# EAGLE board drv_8302_ME5120 (EAGLE 9.7.0)
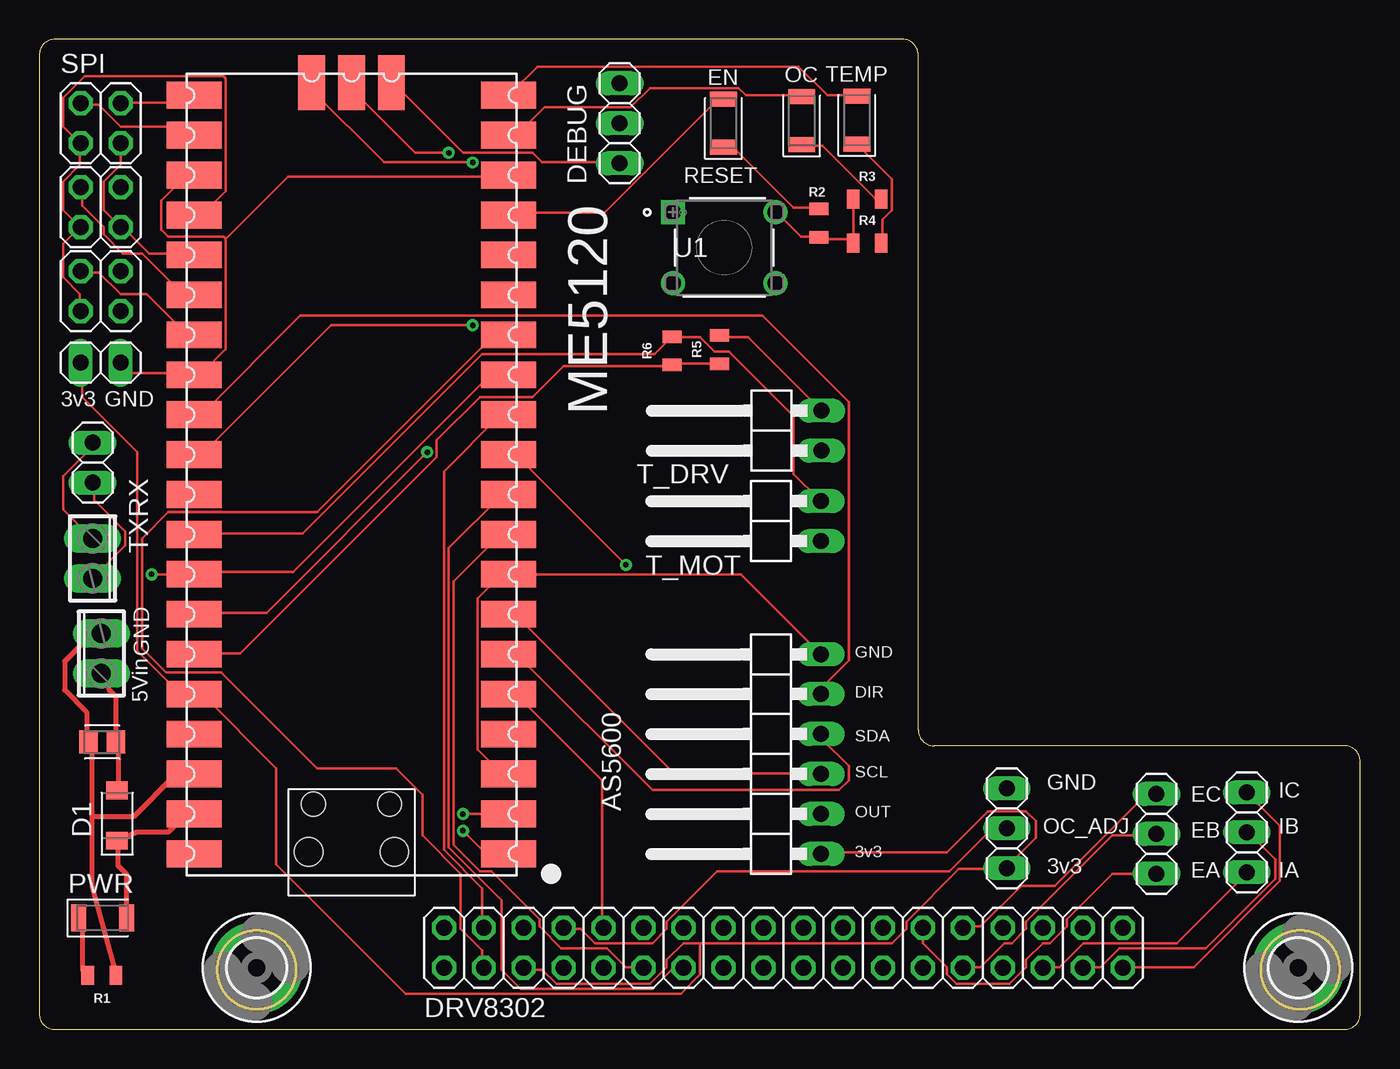
[diagram p0: board, top side]
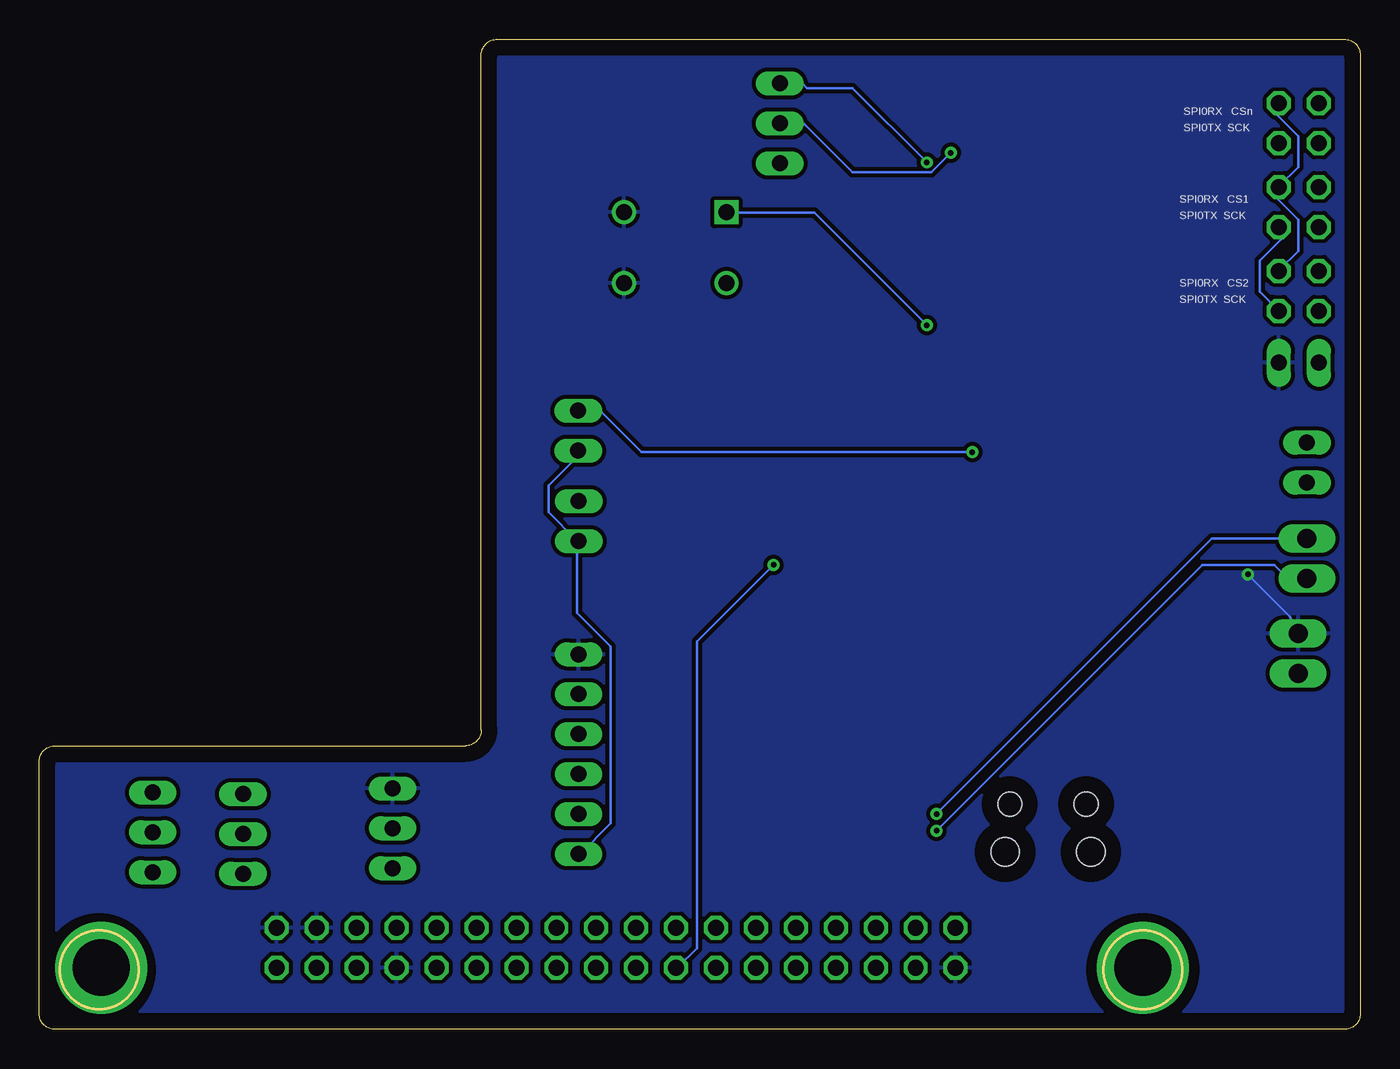
[diagram p1: board, bottom side, seen from below]

Size 84.03 x 63 mm. Coordinates in mm from the lower left corner, seen from the top.
Outline: 55.92,19.05 55.92,62 arc90 54.92,63 1,63 arc90 0,62 0,1 arc90 1,0 83.03,0 arc90 84.03,1 84.03,17.05 arc90 83.03,18.05 56.92,18.05 arc-90 55.92,19.05
Outline: circle at 80.23,3.8 radius 2.5
Outline: circle at 13.83,3.8 radius 2.5
Copper layers (1*16): Top 0.035mm / dielectric 1.5mm / Bottom 0.035mm
Design rules "Fusion Electronics Design Rules": minimum track width 6mil, minimum drill 0.35mm, track to track 6mil, track to pad 6mil, pad to pad 6mil, via to via 6mil, smd to smd 6mil, copper to edge 40mil, drill to drill 6mil, minimum pad ring 10mil, minimum via ring 8mil, stop-mask expansion 4mil, vias tented up to drill 0mil, thermal gap 10mil

## Footprints (pad centres in the part's own frame; a part is rotated, then mirrored left to right if it is on the bottom)
1X06/90 = drill 1.016 long: 1 -6.35,-3.81; 2 -3.81,-3.81; 3 -1.27,-3.81; 4 1.27,-3.81; 5 3.81,-3.81; 6 6.35,-3.81
CAPC2012X110 = smd 1.165 x 1.465: 1 -0.875,0; 2 0.875,0
SODFL3718X115 = smd 1.115 x 1.361: 1 -1.6,0; 2 1.6,0
1X03 = drill 1.016 long: 1 -2.54,0; 2 0,0; 3 2.54,0
2X18 = drill 1.016 octagon: 1 -21.59,-1.27; 2 -21.59,1.27; 3 -19.05,-1.27; 4 -19.05,1.27; 5 -16.51,-1.27; 6 -16.51,1.27; 7 -13.97,-1.27; 8 -13.97,1.27; 9 -11.43,-1.27; 10 -11.43,1.27; 11 -8.89,-1.27; 12 -8.89,1.27; 13 -6.35,-1.27; 14 -6.35,1.27; 15 -3.81,-1.27; 16 -3.81,1.27; 17 -1.27,-1.27; 18 -1.27,1.27; 19 1.27,-1.27; 20 1.27,1.27; 21 3.81,-1.27; 22 3.81,1.27; 23 6.35,-1.27; 24 6.35,1.27; 25 8.89,-1.27; 26 8.89,1.27; 27 11.43,-1.27; 28 11.43,1.27; 29 13.97,-1.27; 30 13.97,1.27; 31 16.51,-1.27; 32 16.51,1.27; 33 19.05,-1.27; 34 19.05,1.27; 35 21.59,-1.27; 36 21.59,1.27
LEDC3216X75N_FLAT-G = smd 0.962 x 1.712: A 1.525,0; C -1.525,0
1X02 = drill 1.016 long: 1 -1.27,0; 2 1.27,0
3,6-PAD = drill 3.6 pad 5.842: B3,6 0,0
LEDC3216X75N_FLAT-R = smd 0.962 x 1.712: A 1.525,0; C -1.525,0
2POL254 = drill 1.2 long: 1 -1.27,0; 2 1.27,0
0805 = smd 0.8 x 1.2: 1 -0.9,0; 2 0.9,0
PICO-PKG-SMD = smd 3.5 x 1.7: P$1 -10,24.13; P$2 -10,21.59; P$3 -10,19.05; P$4 -10,16.51; P$5 -10,13.97; P$6 -10,11.43; P$7 -10,8.89; P$8 -10,6.35; P$9 -10,3.81; P$10 -10,1.27; P$11 -10,-1.27; P$12 -10,-3.81; P$13 -10,-6.35; P$14 -10,-8.89; P$15 -10,-11.43; P$16 -10,-13.97; P$17 -10,-16.51; P$18 -10,-19.05; P$19 -10,-21.59; P$20 -10,-24.13; P$21 10,-24.13; P$22 10,-21.59; P$23 10,-19.05; P$24 10,-16.51; P$25 10,-13.97; P$26 10,-11.43; P$27 10,-8.89; P$28 10,-6.35; P$29 10,-3.81; P$30 10,-1.27; P$31 10,1.27; P$32 10,3.81; P$33 10,6.35; P$34 10,8.89; P$35 10,11.43; P$36 10,13.97; P$37 10,16.51; P$38 10,19.05; P$39 10,21.59; P$40 10,24.13 | smd 1.7 x 3.5: P$41 -2.54,-24.925; P$42 0,-24.925; P$43 2.54,-24.925 | hole 1.8: -2.725,24; 2.725,24 | hole 1.5: -2.425,20.97; 2.425,20.97
2X02 = drill 1.016 octagon: 1 -1.27,-1.27; 2 -1.27,1.27; 3 1.27,-1.27; 4 1.27,1.27
1X02/90 = drill 1.016 long: 1 -1.27,-3.81; 2 1.27,-3.81
SWITCH_1-1825910-0 = drill 1.016 pad 1.524 square: 1 -6.502,4.496 | drill 1.016 pad 1.524: 2 -6.502,0; 3 0,0; 4 0,4.496

## Placement (x,y rotation side)
AS5600  [1X06/90]  45.92,17.53 90 top
C1  10uf  [CAPC2012X110]  4,18.29 0 top
D1  MBR0520LT1G  [SODFL3718X115]  4.95,13.61 90 top
DEBUG  PINHD-1X3  [1X03]  36.92,57.66 90 top
DRV8302  [2X18]  47.33,5.21 0 top
EN  LED_GREEN  [LEDC3216X75N_FLAT-G]  43.52,57.66 90 top
FTDI_PSU  PINHD-1X2  [1X02]  3.9,42.42 0 top
H1  MOUNT-PAD-ROUND3.6  [3,6-PAD]  13.83,3.94 0 top
H2  MOUNT-PAD-ROUND3.6  [3,6-PAD]  80.09,3.94 0 top
JP_EMF  PINHD-1X3  [1X03]  71.08,12.45 90 top
JP_IOUT  PINHD-1X3  [1X03]  76.82,12.55 90 top
JP_OC  PINHD-1X3  [1X03]  61.55,12.8 90 top
OC  LED_RED  [LEDC3216X75N_FLAT-R]  48.5,57.83 90 top
PSU_BLOCK  [2POL254]  3.95,23.93 90 top
PWR  LED_GREEN  [LEDC3216X75N_FLAT-G]  4.04,7.11 0 top
R1  [0805]  3.98,3.44 180 top
R2  [0805]  49.6,51.31 90 top
R3  [0805]  52.66,52.83 0 top
R4  [0805]  52.66,50.04 0 top
R5  [0805]  43.27,43.26 90 top
R6  [0805]  40.26,43.18 270 top
RPI_PICO  RASPBERRY_PICOSMD  [PICO-PKG-SMD]  19.86,35.31 180 top
SERIAL  PINHD-1X2  [1X02]  3.39,36.07 270 top
SPI  PINHD-2X2  [2X02]  3.9,57.66 0 top
SPI_EXTRA  PINHD-2X2  [2X02]  3.9,46.99 0 top
SPI_INF  PINHD-2X2  [2X02]  3.9,52.32 0 top
T_DRV  PINHD-1X2/90  [1X02/90]  45.93,38.1 90 top
T_MOT  PINHD-1X2/90  [1X02/90]  45.9,32.34 90 top
TEMP  LED_RED  [LEDC3216X75N_FLAT-R]  52.01,57.86 90 top
TXRX  [2POL254]  3.39,29.97 270 top
U1  1-1825910-0  [SWITCH_1-1825910-0]  46.82,47.5 0 top

## Library data of the parts
AS5600 DRV8302 = pinhead
C1 = Capacitor; CATEGORY: Capacitor
D1 = Diode; CATEGORY: Diode; DESCRIPTION: DIODE SCHOTTKY 20V 500MA SOD123; MANUFACTURER: ON Semiconductor; MPN: MBR0520LT1G; SUB-CATEGORY: Schottky
DEBUG JP_EMF JP_IOUT JP_OC SPI SPI_EXTRA SPI_INF = Connector; CATEGORY: CONNECTOR; SUB-CATEGORY: PIN-HEADER
EN PWR = LED; CATEGORY: LED; COLOR: GREEN; DESCRIPTION: CHIP LED FLAT; SUB-CATEGORY: CHIP; TYPE: FLAT_TOP
FTDI_PSU SERIAL = Connector; CATEGORY: Headers; DESCRIPTION: Header, Straight, 2 Position; MANUFACTURER: Generic; MPN: Generic; OPERATING_TEMPERATURE: Generic; PART_STATUS: Active; PITCH: 0.100" (2.54mm); ROHS_COMPLIANCE: Generic; SERIES: Generic; SUB-CATEGORY: Headers, Male Pins; TYPE: Board to Board or Cable, Unshrouded, Through Hole, Straight
H1 H2 = holes
OC TEMP = LED; CATEGORY: LED; COLOR: RED; DESCRIPTION: CHIP LED FLAT; SUB-CATEGORY: CHIP; TYPE: FLAT_TOP
PSU_BLOCK TXRX = con-phoenix-254; OC_FARNELL: unknown; OC_NEWARK: unknown
R1-R6 = SparkFun-Resistors
RPI_PICO = RpiPico
T_DRV T_MOT = Connector; CATEGORY: Headers; DESCRIPTION: Header, Right Angle, 2 Position; MANUFACTURER: Generic; MPN: Generic; OPERATING_TEMPERATURE: Generic; PART_STATUS: Active; PITCH: 0.100" (2.54mm); ROHS_COMPLIANCE: Generic; SERIES: Generic; SUB-CATEGORY: Headers, Male Pins; TYPE: Board to Board or Cable, Unshrouded, Through Hole, Right Angle
U1 = Switches; BUILT_BY: EMA_UL_Team; CATEGORY: Tactile Switches; COPYRIGHT: Copyright (C) 2016 Accelerated Designs. All rights reserved; DESCRIPTION: FSM6JH=6MM TACT SWITCH, HIGH TEMP; MANUFACTURER_PART_NUMBER: 1-1825910-0; PART_STATUS: active; SERIES: Unknown; VENDOR: TE Connectivity

## Nets
5V: D1.1 PWR.A RPI_PICO.P$39
ADC_GND: R5.1 R6.2 RPI_PICO.P$35
ALARM_OC: OC.A RPI_PICO.P$19
ALARM_TEMP: RPI_PICO.P$20 TEMP.A
DIR: AS5600.5 RPI_PICO.P$29
EMF-A: DRV8302.26 JP_EMF.1
EMF-B: DRV8302.27 JP_EMF.2
EMF-C: DRV8302.28 JP_EMF.3
EN-GATE: DRV8302.10 RPI_PICO.P$5
EN_LED: EN.A RPI_PICO.P$17
GAIN: DRV8302.7
GND: AS5600.6 C1.1 DRV8302.1 DRV8302.29 DRV8302.34 DRV8302.36 FTDI_PSU.2 JP_OC.3 PSU_BLOCK.2 R1.1 R2.1 R3.1 R4.1 RPI_PICO.P$3 RPI_PICO.P$8 RPI_PICO.P$13 RPI_PICO.P$18 RPI_PICO.P$23 RPI_PICO.P$28 RPI_PICO.P$33 RPI_PICO.P$38 U1.3 U1.4
INHA: DRV8302.11 RPI_PICO.P$9
INHB: DRV8302.13 RPI_PICO.P$10
INHC: DRV8302.15 RPI_PICO.P$11
IOUTA: DRV8302.31 JP_IOUT.1
IOUTB: DRV8302.33 JP_IOUT.2
IOUTC: DRV8302.35 JP_IOUT.3
M_OC: DRV8302.6
N$1: PWR.C R1.2
N$2: OC.C R3.2
N$3: EN.C R2.2
N$4: R4.2 TEMP.C
N_FAULT: DRV8302.4 RPI_PICO.P$12
N_OCTW: DRV8302.3 RPI_PICO.P$14
OC_ADJ: DRV8302.8 JP_OC.2
OC_CAL: DRV8302.9
OUT_PWM: AS5600.2
PWR: C1.2 D1.2 PSU_BLOCK.1
PWRGD: DRV8302.2
RESET: RPI_PICO.P$30 U1.1
RX: RPI_PICO.P$2 SERIAL.1 TXRX.1
SCL: AS5600.3 RPI_PICO.P$7
SDA: AS5600.4 RPI_PICO.P$6
SPI0CS1: RPI_PICO.P$26 SPI_INF.2
SPI0CS2: RPI_PICO.P$27 SPI_EXTRA.2
SPI0CSN: RPI_PICO.P$22 SPI.2
SPI0RX: RPI_PICO.P$21 SPI.4 SPI_EXTRA.4 SPI_INF.4
SPI0SCK: RPI_PICO.P$24 SPI.1 SPI_EXTRA.1 SPI_INF.1
SPI0TX: RPI_PICO.P$25 SPI.3 SPI_EXTRA.3 SPI_INF.3
SWCLK: DEBUG.1 RPI_PICO.P$41
SWDIO: DEBUG.3 RPI_PICO.P$43
SWGND: DEBUG.2 RPI_PICO.P$42
T_DRV: R5.2 RPI_PICO.P$34 T_DRV.2
T_MOT: R6.1 RPI_PICO.P$32 T_MOT.2
TX: RPI_PICO.P$1 SERIAL.2 TXRX.2
V_REF: DRV8302.32
VBUS: RPI_PICO.P$40
VCC_3V3: AS5600.1 DRV8302.5 FTDI_PSU.1 JP_OC.1 RPI_PICO.P$36 T_DRV.1 T_MOT.1

## Tracks (layer width: path | path; a pad name or v marks a point on that pad's centre or on a via)
5V
  Top 0.152: RPI_PICO.P$39 9.74,13.72
  Top 0.305: PWR.A 5.56,9.86 5.01,10.41 5.01,11.89 D1.1 6.18,12.55 8.2,12.55 9.37,13.72 9.74,13.72
ADC_GND
  Top 0.152: R5.1 40.37,42.37 R6.2 40.22,42.22 33.36,42.22 31.38,40.23 28.03,40.23 25.28,37.49 25.28,36.42 12.79,23.93 9.89,23.93 RPI_PICO.P$35
ALARM_OC
  Top 0.152: OC.A 48.45,59.44 44.94,59.44 44.48,59.89 38.85,59.89 37.63,58.67 32.14,58.67 30.46,57 30.01,57 RPI_PICO.P$19
ALARM_TEMP
  Top 0.152: TEMP.A 51.95,59.44 50.12,59.44 48.29,61.27 31.68,61.27 30.01,59.59 RPI_PICO.P$20
DIR
  Top 0.152: AS5600.5 49.82,21.34 49.82,21.79 51.5,23.47 51.5,39.93 46.01,45.41 16.6,45.41 10.35,39.17 9.89,39.17 RPI_PICO.P$29
EMF-A
  Top 0.152: DRV8302.26 56.22,6.4 56.22,5.49 57.74,3.96 57.74,3.5 58.35,2.9 61.71,2.9 62.77,3.96 62.77,4.42 63.84,5.49 64.3,5.49 65.36,6.55 65.36,7.01 68.26,9.91 71,9.91 JP_EMF.1
EMF-B
  Top 0.152: DRV8302.27 58.81,3.96 59.88,3.96 61.4,5.49 61.86,5.49 62.77,6.4 62.77,6.86 68.26,12.34 71,12.34 JP_EMF.2
EMF-C
  Top 0.152: DRV8302.28 58.81,6.55 59.88,6.55 62.47,9.14 64.6,9.14 70.39,14.94 71,14.94 JP_EMF.3
EN-GATE
  Top 0.152: DRV8302.10 35.8,6.55 35.8,15.85 30.31,21.34 30.01,21.34 RPI_PICO.P$5
EN_LED
  Top 0.152: EN.A 43.42,59.13 43.11,59.13 35.95,51.97 30.01,51.97 RPI_PICO.P$17
GND  (via drill 0.35)
  Top 0.152: RPI_PICO.P$13 29.85,41.6 28.64,41.6 16.14,29.11 9.89,29.11 RPI_PICO.P$33 9.74,28.96 v7.15,28.96 | RPI_PICO.P$3 29.85,16.31 29.4,16.31 27.87,17.83 27.87,27.43 29.4,28.96 RPI_PICO.P$8 30.01,28.96 44.64,28.96 49.67,23.93 AS5600.6 | R3.1 51.8,52.73 51.8,50.14 R4.1 51.65,50.14 51.5,50.29 49.67,50.29 R2.1 49.51,50.44 48.45,50.44 46.92,51.97 U1.4 | FTDI_PSU.2 5.17,42.37 5.78,41.76 9.74,41.76 RPI_PICO.P$28 9.89,41.76 10.35,41.76 11.87,43.28 11.87,50.29 | 11.87,50.29 11.72,50.44 8.21,50.44 7.76,50.9 7.76,52.73 9.28,54.25 9.74,54.25 RPI_PICO.P$23 | 11.87,50.29 15.83,54.25 29.85,54.25 RPI_PICO.P$18
  Top 0.203: 3.18,18.29 C1.1 3.03,18.29
  Top 0.305: 3.34,13.56 3.34,14.33 3.34,18.14 3.18,18.29 | 3.34,13.56 3.34,13.31 3.34,9.14 R1.1 | 3.34,13.56 6.03,13.56 8.62,16.15 9.74,16.15 RPI_PICO.P$38 | 3.03,18.29 3.03,20.17 1.61,21.59 1.61,23.42 2.85,24.65 PSU_BLOCK.2
  Bottom 0.152: v7.15,28.96 4.47,26.28 PSU_BLOCK.2
  pour Bottom (isolate 0.254): -0.38,-22.25 78.02,-22.25 99.3,-0.97 99.3,25.61 56.94,67.97 -7.18,70.51 -7.18,-15.45
INHA
  Top 0.152: DRV8302.11 38.39,3.96 37.32,3.96 36.1,5.18 33.21,5.18 31.84,6.55 31.84,7.01 28.79,10.06 28.03,10.06 26.35,11.73 26.35,28.5 29.24,31.39 29.85,31.39 RPI_PICO.P$9
INHB
  Top 0.152: DRV8302.13 40.98,3.81 40.22,3.81 39,2.59 30.62,2.59 29.4,3.81 29.4,8.23 26.04,11.58 26.04,30.63 29.4,33.98 29.85,33.98 RPI_PICO.P$10
INHC  (via drill 0.35)
  Top 0.152: v37.32,29.57 30.31,36.58 30.01,36.58 RPI_PICO.P$11
  Bottom 0.152: v37.32,29.57 42.2,24.69 42.2,5.18 43.42,3.96 DRV8302.15
IOUTA
  Top 0.152: DRV8302.31 63.84,3.96 64.91,3.96 66.43,5.49 72.37,5.49 76.79,9.91 JP_IOUT.1
IOUTB
  Top 0.152: DRV8302.33 66.43,3.96 67.5,3.96 68.72,5.18 74.2,5.18 78.62,9.6 78.62,10.82 76.95,12.5 JP_IOUT.2
IOUTC
  Top 0.152: DRV8302.35 69.02,3.96 73.44,3.96 78.93,9.45 78.93,12.95 76.95,14.94 JP_IOUT.3
N$1
  Top 0.305: PWR.C 2.77,6.86 2.77,3.75 R1.2
N$2
  Top 0.152: R3.2 53.48,52.88 53.17,52.88 49.82,56.24 48.6,56.24 OC.C
N$3
  Top 0.152: R2.2 49.51,52.27 47.99,52.27 44.18,56.08 43.57,56.08 EN.C
N$4
  Top 0.152: R4.2 53.63,50.14 53.63,51.51 54.24,52.12 54.24,54.1 52.1,56.24 TEMP.C
N_FAULT
  Top 0.152: DRV8302.4 28.18,6.55 28.18,8.99 25.74,11.43 25.74,35.51 29.24,39.01 29.85,39.01 RPI_PICO.P$12
N_OCTW
  Top 0.152: DRV8302.3 28.18,3.96 28.18,5.03 26.81,6.4 26.81,9.91 24.37,12.34 24.37,14.94 22.69,16.61 17.66,16.61 11.57,22.71 8.06,22.71 6.54,24.23 6.54,31.24 8.21,32.92 17.66,32.92 28.94,44.2 RPI_PICO.P$14
OC_ADJ
  Top 0.152: DRV8302.8 33.36,6.4 34.43,6.4 35.34,5.49 39,5.49 39.91,6.4 39.91,6.86 43.11,10.06 57.9,10.06 60.49,12.65 61.55,12.65 JP_OC.2
PWR
  Top 0.152: C1.2
  Top 0.305: D1.2 5.01,15.24 5.01,18.29 C1.2 | C1.2 4.86,21.18 4.47,21.57 PSU_BLOCK.1
RESET  (via drill 0.35)
  Top 0.152: v27.57,44.81 18.58,44.81 10.5,36.73 9.89,36.73 RPI_PICO.P$30
  Bottom 0.152: v27.57,44.81 34.73,51.97 40.22,51.97 U1.1
RX  (via drill 0.35)
  Top 0.152: SERIAL.1 3.34,37.34 3.34,37.03 1.51,35.2 1.51,33.07 3.34,31.24 TXRX.1 | v26.96,13.72 RPI_PICO.P$2
  Bottom 0.152: v26.96,13.72 9.43,31.24 5.17,31.24 3.49,31.24 TXRX.1
SCL
  Top 0.152: AS5600.3 49.67,16.31 40.37,16.31 30.31,26.36 30.01,26.36 RPI_PICO.P$7
SDA
  Top 0.152: AS5600.4 49.82,18.75 49.82,18.44 51.5,16.76 51.5,15.85 50.89,15.24 39,15.24 30.46,23.77 30.01,23.77 RPI_PICO.P$6
SPI0CS1
  Top 0.152: SPI_INF.2 2.73,53.49 2.73,52.43 4.1,51.05 4.1,50.6 5.32,49.38 6.54,49.38 9.13,46.79 9.74,46.79 RPI_PICO.P$26
SPI0CS2
  Top 0.152: SPI_EXTRA.2 2.73,48.16 3.79,48.16 5.17,46.79 6.84,46.79 9.28,44.35 9.74,44.35 RPI_PICO.P$27
SPI0CSN
  Top 0.152: SPI.2 2.73,58.83 3.79,58.83 5.17,57.45 9.28,57.45 9.74,57 RPI_PICO.P$22
SPI0RX
  Top 0.152: SPI.4 5.17,58.98 9.28,58.98 9.74,59.44 RPI_PICO.P$21
  Bottom 0.152: SPI_EXTRA.4 5.17,48.31 3.95,49.53 3.95,51.51 5.32,52.88 5.32,53.34 5.17,53.49 SPI_INF.4 5.17,53.65 3.95,54.86 3.95,56.84 5.32,58.22 5.32,58.67 5.17,58.83 SPI.4
SPI0SCK
  Top 0.152: 2.57,51.05 1.51,49.99 1.51,47.85 2.57,46.79 2.57,45.72 SPI_EXTRA.1 | 2.57,51.05 SPI_INF.1 2.57,51.05 | 2.57,56.39 2.57,55.02 1.51,53.95 1.51,52.12 2.57,51.05 | 2.57,56.39 SPI.1 2.57,56.39 | 2.57,56.39 1.51,57.45 1.51,59.28 2.88,60.66 11.72,60.66 11.87,60.5 11.87,53.34 10.5,51.97 9.89,51.97 RPI_PICO.P$24
SPI0TX
  Top 0.152: SPI.3 5.17,55.02 4.1,53.95 4.1,52.12 SPI_INF.3 5.32,51.05 6.99,49.38 9.74,49.38 RPI_PICO.P$25
  Bottom 0.152: SPI_EXTRA.3 6.38,46.94 6.38,48.92 5.01,50.29 5.01,50.9 SPI_INF.3
SWCLK
  Top 0.152: DEBUG.1 36.86,55.17 31.99,55.17 31.38,55.78 26.96,55.78 22.54,60.2 RPI_PICO.P$41
SWDIO  (via drill 0.35)
  Top 0.152: v27.57,55.17 21.93,55.17 17.36,59.74 17.36,60.2 RPI_PICO.P$43
  Bottom 0.152: v27.57,55.17 32.29,59.89 35.19,59.89 35.49,60.2 36.86,60.2 DEBUG.3
SWGND  (via drill 0.35)
  Top 0.152: v26.04,55.78 23.91,55.78 19.95,59.74 19.95,60.2 RPI_PICO.P$42
  Bottom 0.152: v26.04,55.78 27.26,54.56 32.29,54.56 35.34,57.61 36.86,57.61 DEBUG.2
T_DRV  (via drill 0.35)
  Top 0.152: R5.2 43.27,44.04 45.09,44.04 49.67,39.47 T_DRV.2 | v24.67,36.73 14.46,26.52 9.89,26.52 RPI_PICO.P$34
  Bottom 0.152: v24.67,36.73 45.7,36.73 48.29,39.32 49.67,39.32 T_DRV.2
T_MOT
  Top 0.152: T_MOT.2 49.67,33.68 47.99,35.36 47.99,39.01 43.88,43.13 42.96,43.13 42.05,44.04 40.37,44.04 R6.1 40.22,44.04 39.15,42.98 28.18,42.98 16.75,31.55 9.89,31.55 RPI_PICO.P$32
TX  (via drill 0.35)
  Top 0.152: SERIAL.2 3.49,34.75 3.49,33.68 5.47,31.7 5.47,30.79 3.49,28.8 TXRX.2 | v26.96,12.65 28.33,11.28 29.85,11.28 RPI_PICO.P$1
  Bottom 0.152: v26.96,12.65 10.04,29.57 5.47,29.57 4.71,28.8 3.49,28.8 TXRX.2
VCC_3V3
  Top 0.152: FTDI_PSU.1 2.73,42.37 2.73,40.23 6.23,36.73 6.23,24.08 8.82,21.49 9.74,21.49 RPI_PICO.P$36 9.89,21.34 10.35,21.34 15.07,16.61 15.07,10.52 23.3,2.29 40.83,2.29 42.05,3.5 42.05,5.49 | 42.05,5.49 54.24,5.49 55.15,6.4 55.15,6.86 58.51,10.21 61.55,10.21 JP_OC.1 61.55,10.36 63.38,12.19 63.38,13.26 62.77,13.87 60.33,13.87 57.74,11.28 49.82,11.28 AS5600.1 | 42.05,5.49 40.98,5.49 39.91,4.42 39.91,3.96 38.85,2.9 32.9,2.9 31.99,3.81 30.92,3.81 DRV8302.5
  Bottom 0.152: T_DRV.1 49.82,36.73 49.82,36.42 51.65,34.59 51.65,32.92 49.82,31.09 T_MOT.1 49.82,30.94 49.82,26.52 47.69,24.38 47.69,13.11 49.67,11.12 AS5600.1

## Text on the board
tNames: RESET | 3v3 | GND | ME5120 | GND | GND | 5Vin | DIR | SDA | SCL | GND | IC | EC | OUT | OC_ADJ | EB | IB | 3v3 | 3v3 | EA | IA
bNames: CSn | SPI0RX | SCK | SPI0TX | CS1 | SPI0RX | SCK | SPI0TX | CS2 | SPI0RX | SCK | SPI0TX